# EAGLE board 2D IR PCB v37 (EAGLE 9.7.0)
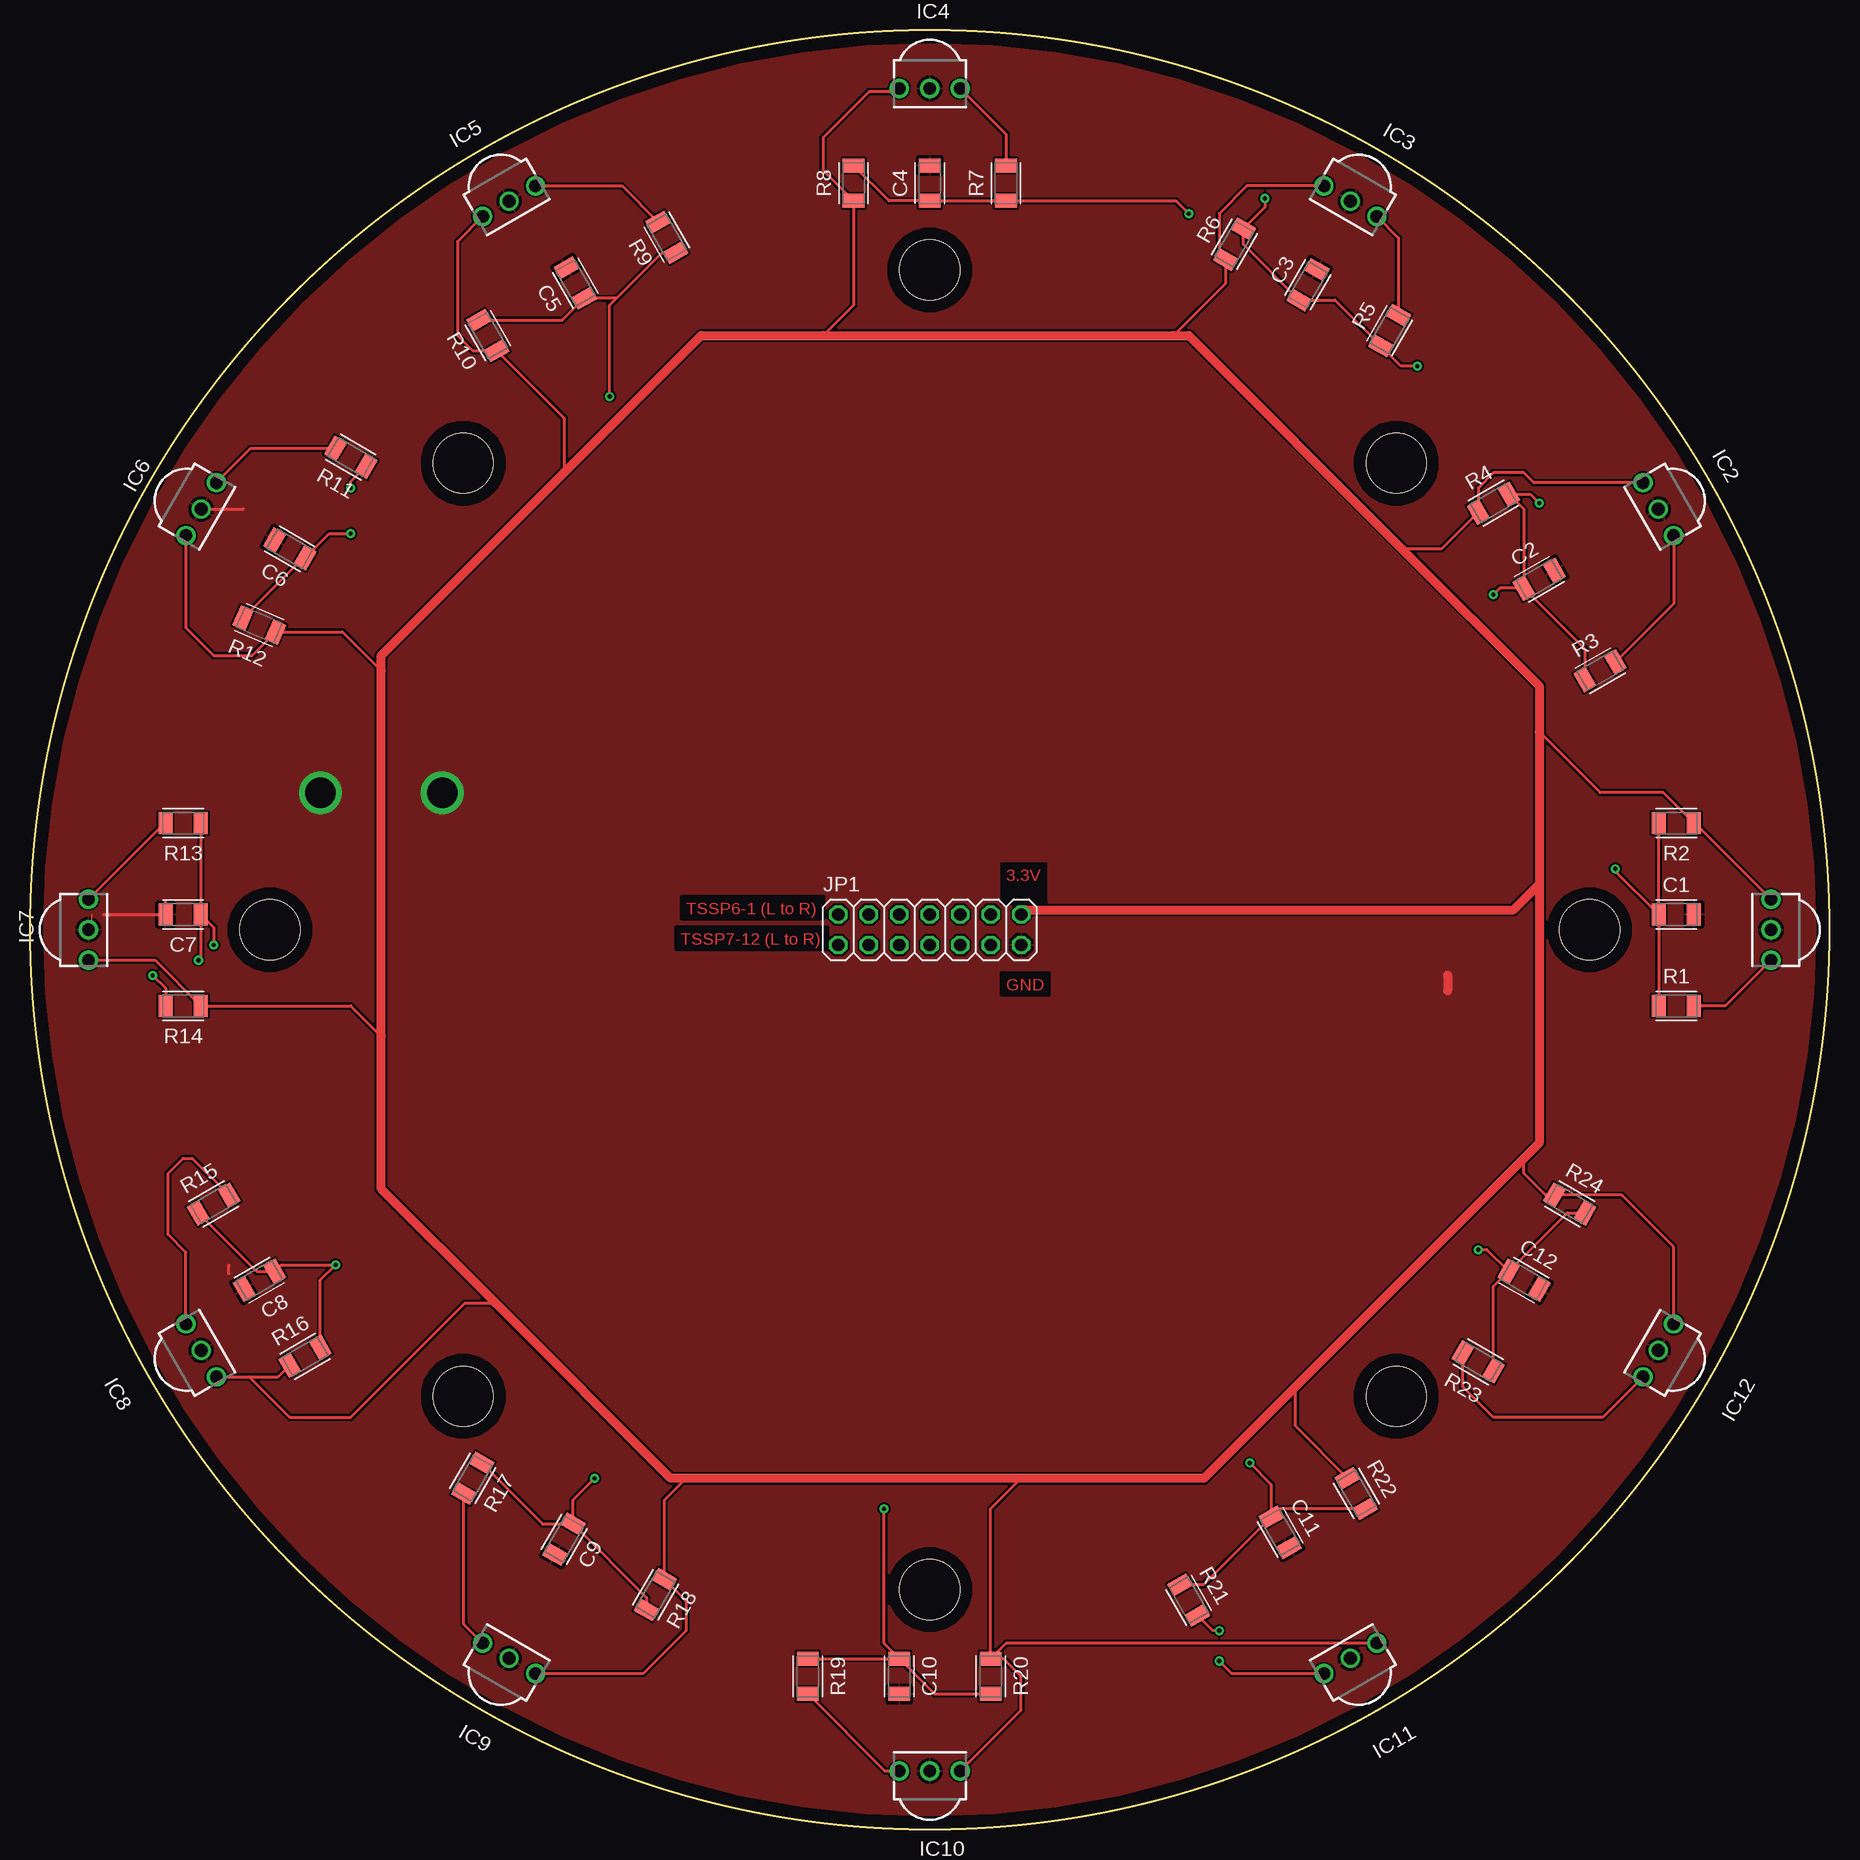
[diagram p0: board, top side]
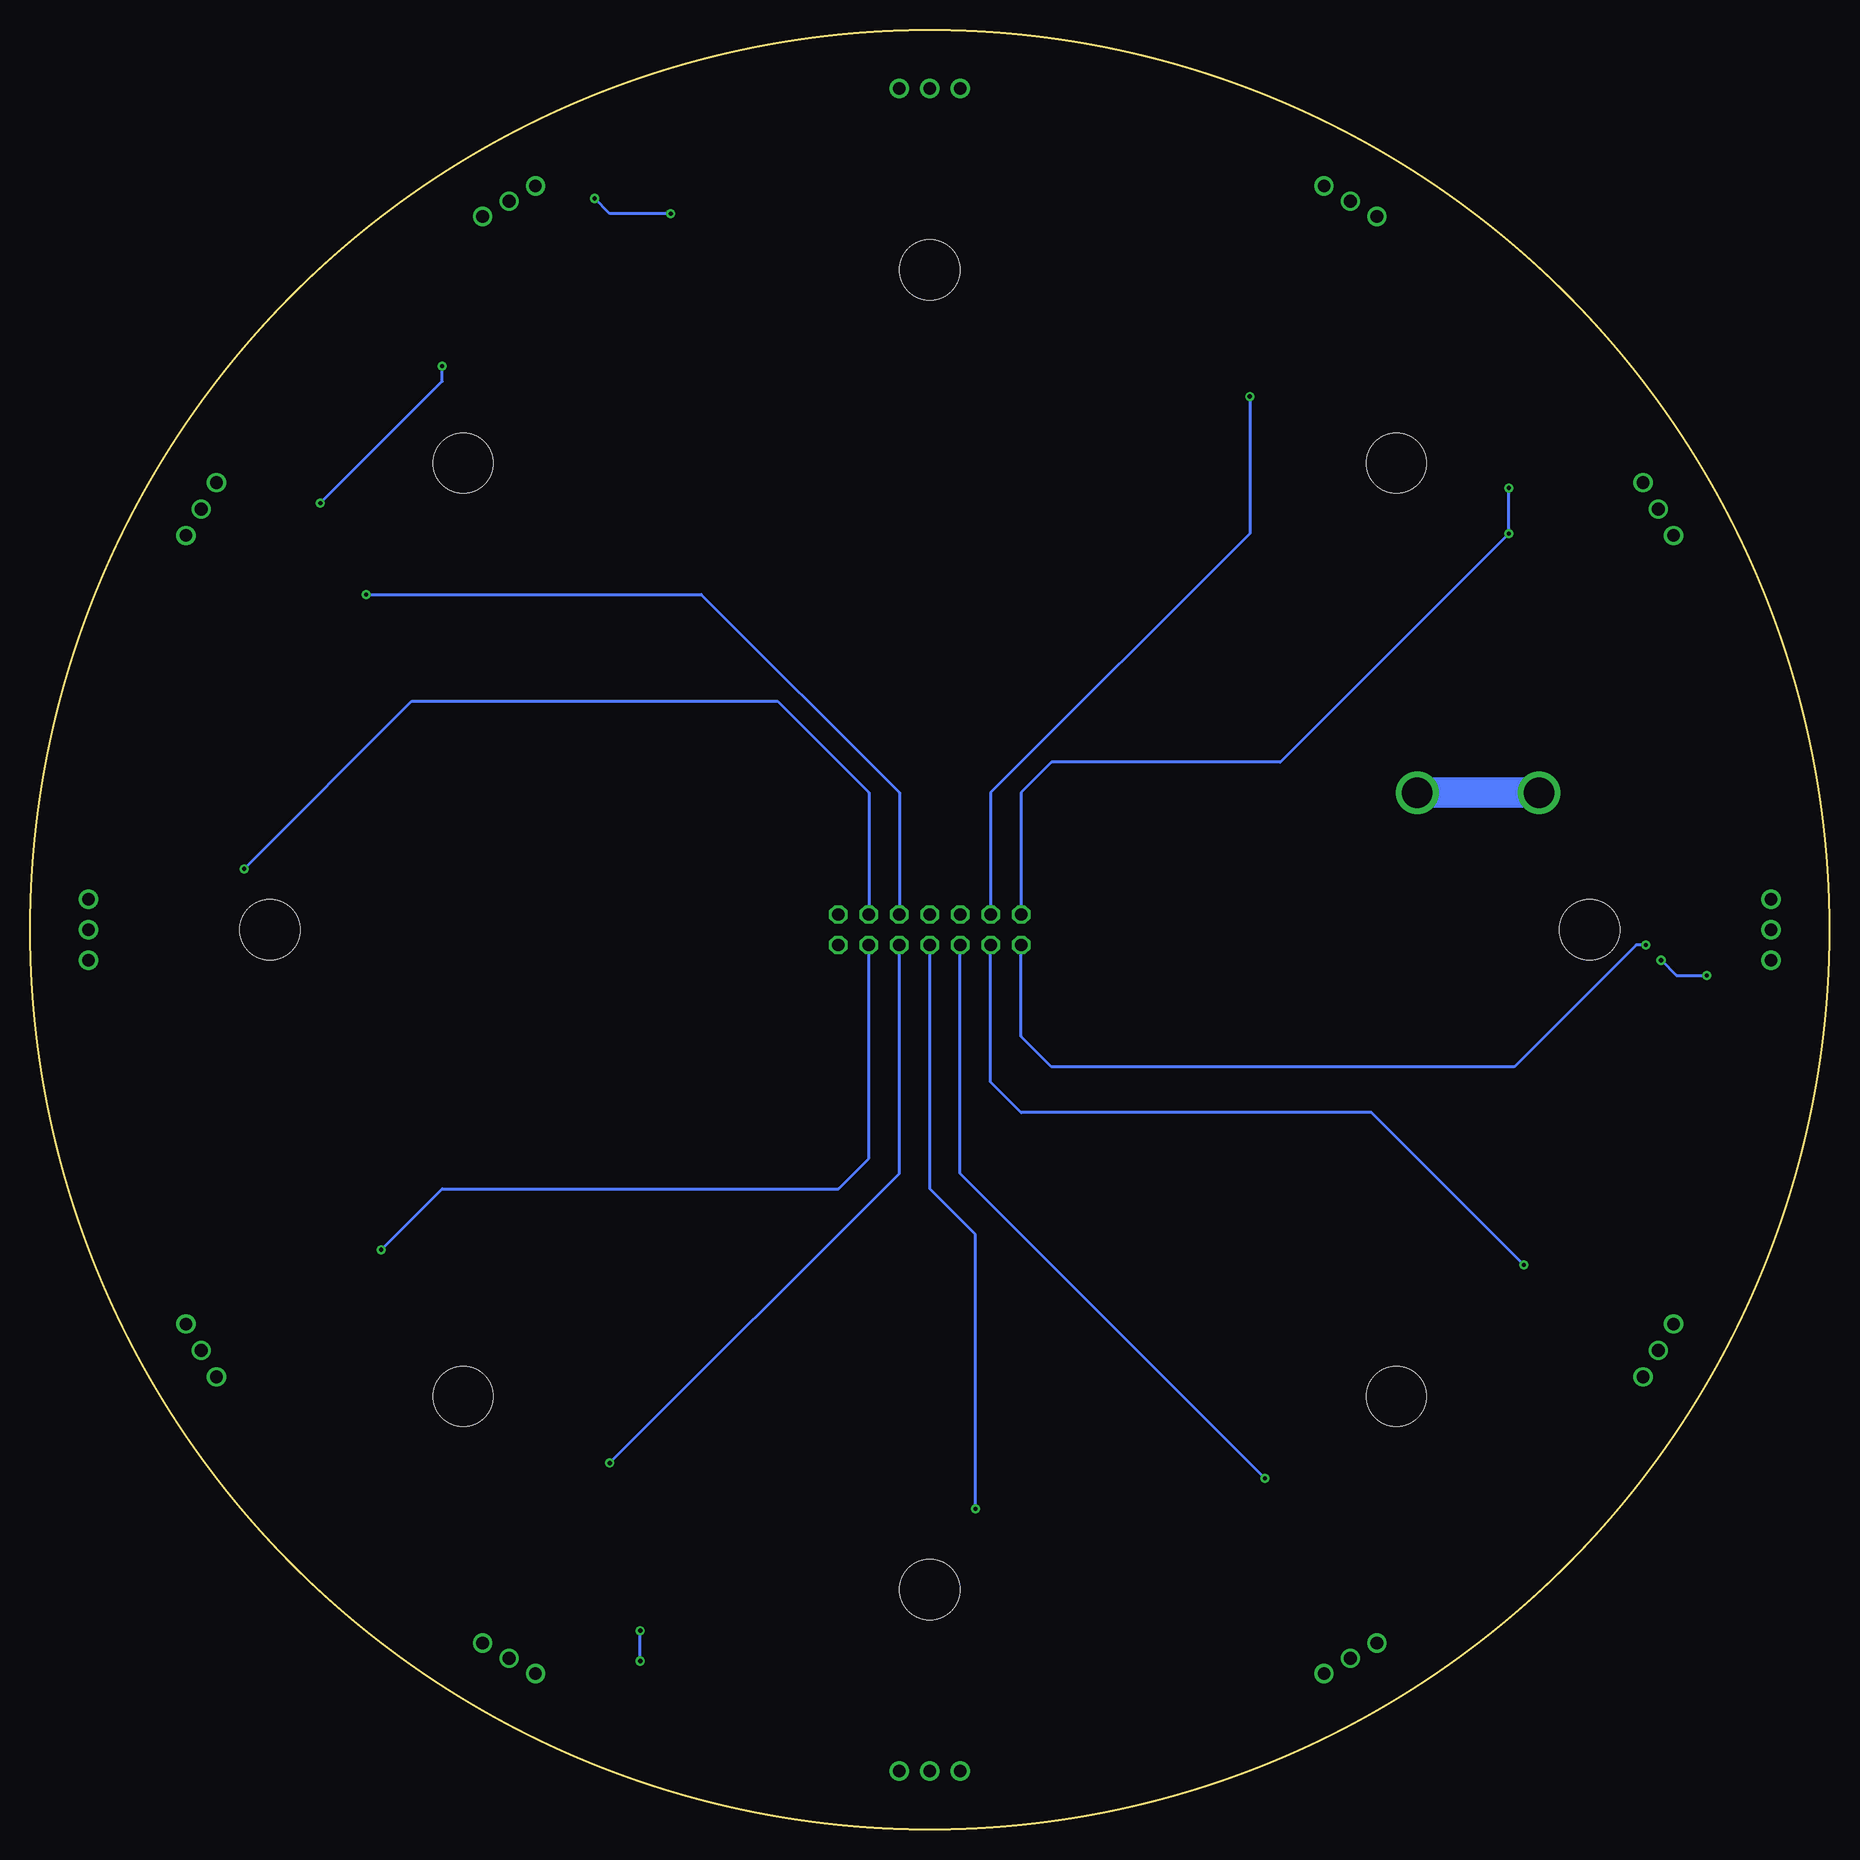
[diagram p1: board, bottom side, seen from below]

Size 150 x 150 mm. Coordinates in mm from the lower left corner, seen from the top.
Outline: circle at 75,75 radius 75
Copper layers (1*16): Top / Bottom
Stack-up Default Layer Stack: Top User Defined 0.035mm / Dielectric-1 User Defined 1.5mm / Bottom User Defined 0.035mm
Design rules: minimum copper width 6mil, minimum drill size 0.35mm, copper clearance wire_polygon to wire_polygon 6mil, copper clearance wire_polygon to pad_smd 6mil, copper clearance wire_polygon to via 6mil, copper clearance pad_smd to pad_smd 6mil, copper clearance pad_smd to via 6mil, copper clearance via to via 6mil, copper clearance smd to pad (same net) 6mil, copper clearance smd to via (same net) 6mil, copper clearance smd to smd (same net) 6mil, dimension clearance 40mil, restrict clearance 0mil, drill distance 6mil, keepout clearance 0mil
Holes 5 mm at 130,75 113.89,113.89 75,130 36.11,113.89 20,75 36.11,36.11 75,20 113.89,36.11

## Footprints (pad centres in the part's own frame; a part is rotated, then mirrored left to right if it is on the bottom)
CAPC3216X135 = smd 1.165 x 1.815: 1 -1.475,0; 2 1.475,0
TSSP4038 = drill 1.06 pad 1.6: 1 -2.54,-1.55; 2 0,-1.55; 3 2.54,-1.55
2X07 = drill 1.016 octagon: 1 -7.62,-1.27; 2 -7.62,1.27; 3 -5.08,-1.27; 4 -5.08,1.27; 5 -2.54,-1.27; 6 -2.54,1.27; 7 0,-1.27; 8 0,1.27; 9 2.54,-1.27; 10 2.54,1.27; 11 5.08,-1.27; 12 5.08,1.27; 13 7.62,-1.27; 14 7.62,1.27
RESC3216X70 = smd 1.165 x 1.815: 1 -1.475,0; 2 1.475,0

## Placement (x,y rotation side)
C1  4.7uF  [CAPC3216X135]  137.23,76.27 0 top
C2  4.7uF  [CAPC3216X135]  125.8,104.21 30 top
C3  4.7uF  [CAPC3216X135]  106.53,128.76 60 top
C4  4.7uF  [CAPC3216X135]  75,137.23 90 top
C5  4.7uF  [CAPC3216X135]  45.46,128.91 120 top
C6  4.7uF  [CAPC3216X135]  21.66,106.75 150 top
C7  4.7uF  [CAPC3216X135]  12.77,76.27 180 top
C8  4.7uF  [CAPC3216X135]  19.12,45.79 210 top
C9  4.7uF  [CAPC3216X135]  44.52,24.2 240 top
C10  4.7uF  [CAPC3216X135]  72.46,12.77 270 top
C11  4.7uF  [CAPC3216X135]  104.21,24.77 300 top
C12  4.7uF  [CAPC3216X135]  124.53,45.79 330 top
IC1  TSSP4038  [TSSP4038]  143.58,75 90 top
IC2  TSSP4038  [TSSP4038]  134.39,109.29 120 top
IC3  TSSP4038  [TSSP4038]  109.29,134.39 150 top
IC4  TSSP4038  [TSSP4038]  75,143.58 180 top
IC5  TSSP4038  [TSSP4038]  40.71,134.39 210 top
IC6  TSSP4038  [TSSP4038]  15.61,109.29 240 top
IC7  TSSP4038  [TSSP4038]  6.42,75 270 top
IC8  TSSP4038  [TSSP4038]  15.61,40.71 300 top
IC9  TSSP4038  [TSSP4038]  40.71,15.61 330 top
IC10  TSSP4038  [TSSP4038]  75,6.42 0 top
IC11  TSSP4038  [TSSP4038]  109.29,15.61 30 top
IC12  TSSP4038  [TSSP4038]  134.39,40.71 60 top
JP1  PINHD-2X7  [2X07]  75,75 0 top
R1  220  [RESC3216X70]  137.23,68.65 0 top
R2  10k  [RESC3216X70]  137.23,83.89 180 top
R3  220  [RESC3216X70]  130.88,96.59 30 top
R4  10k  [RESC3216X70]  121.99,110.56 30 top
R5  220  [RESC3216X70]  113.33,124.95 60 top
R6  10k  [RESC3216X70]  100.4,132.15 60 top
R7  220  [RESC3216X70]  81.35,137.23 90 top
R8  10k  [RESC3216X70]  68.65,137.23 90 top
R9  220  [RESC3216X70]  53.08,132.72 120 top
R10  10k  [RESC3216X70]  38.17,124.53 120 top
R11  220  [RESC3216X70]  26.74,114.39 150 top
R12  10k  [RESC3216X70]  19.12,100.4 156.6 top
R13  220  [RESC3216X70]  12.77,83.89 180 top
R14  10k  [RESC3216X70]  12.77,68.65 180 top
R15  220  [RESC3216X70]  15.31,52.14 30 top
R16  10k  [RESC3216X70]  22.93,39.44 30 top
R17  220  [RESC3216X70]  36.9,29.28 240 top
R18  10k  [RESC3216X70]  52.14,19.58 240 top
R19  220  [RESC3216X70]  64.84,12.77 270 top
R20  10k  [RESC3216X70]  80.08,12.77 270 top
R21  220  [RESC3216X70]  96.59,19.12 300 top
R22  10k  [RESC3216X70]  110.56,28.01 300 top
R23  220  [RESC3216X70]  120.72,38.98 150 top
R24  10k  [RESC3216X70]  128.34,52.14 330 top

## Library data of the parts
C1-C12 = Tutorial - Fusion 360; CATEGORY: Capacitor
IC1-IC12 = TSSP4038; ARROW_PART_NUMBER: TSSP4038; ARROW_PRICE-STOCK: https://www.arrow.com/en/products/tssp4038/vishay?region=nac; DESCRIPTION: IR Receiver Module 38KHz 25m EMI 3-Pin Vishay TSSP4038, 38kHz IR Receiver, 950nm +/-45 , 25m Range, 2.5V - 5V, Through Hole, 6 x 3.9 x 6.95mm; HEIGHT: mm; MANUFACTURER_NAME: Vishay; MANUFACTURER_PART_NUMBER: TSSP4038; MOUSER_PART_NUMBER: 782-TSSP4038; MOUSER_PRICE-STOCK: https://www.mouser.co.uk/ProductDetail/Vishay-Semiconductors/TSSP4038?qs=lgjwDzixuo3Ja5hn%252BEmOdw%3D%3D
JP1 = Connector; CATEGORY: Headers; DESCRIPTION: Header, Straight, 2x7 Position; MANUFACTURER: Generic; MPN: Generic; OPERATING_TEMPERATURE: Generic; PART_STATUS: Active; PITCH: 0.100" (2.54mm); ROHS_COMPLIANCE: Generic; SERIES: Generic; SUB-CATEGORY: Headers, Male Pins; TYPE: Board to Board or Cable, Unshrouded, Through Hole, Straight
R1-R24 = Resistor; CATEGORY: Resistor; SUB-CATEGORY: Fixed

## Nets
3V3: IC1.3 IC2.3 IC3.3 IC4.3 IC5.3 IC6.3 IC7.3 IC8.3 IC9.3 IC10.3 IC11.3 IC12.3 JP1.14 R2.1 R4.1 R6.1 R8.1 R10.1 R12.1 R14.1 R16.1 R18.1 R20.1 R22.1 R24.1
GND: C1.2 C2.2 C3.2 C4.2 C5.2 C6.2 C7.2 C8.2 C9.2 C10.2 C11.2 C12.2 IC1.2 IC2.2 IC3.2 IC4.2 IC5.2 IC6.2 IC7.2 IC8.2 IC9.2 IC10.2 IC11.2 IC12.2 JP1.13
N$1: IC12.1 R23.2
N$2: IC1.1 R1.2
N$3: IC2.1 R3.2
N$5: IC3.1 R5.2
N$7: IC4.1 R7.2
N$9: IC5.1 R9.2
N$11: IC6.1 R11.2
N$13: IC7.1 R13.2
N$15: IC8.1 R15.2
N$17: IC9.1 R17.2
N$19: IC10.1 R19.2
N$21: IC11.1 R21.2
TSSP1: C1.1 JP1.12 R1.1 R2.2
TSSP2: C2.1 C3.1 C4.1 JP1.10 R3.1 R4.2 R5.1 R6.2 R7.1 R8.2
TSSP3: JP1.8
TSSP4: JP1.6
TSSP5: C5.1 JP1.4 R9.1 R10.2
TSSP6: C6.1 JP1.2 R11.1 R12.2
TSSP7: C7.1 JP1.1 R13.1 R14.2
TSSP8: C8.1 JP1.3 R15.1 R16.2
TSSP9: C9.1 JP1.5 R17.1 R18.2
TSSP10: C10.1 JP1.7 R19.1 R20.2
TSSP11: C11.1 JP1.9 R21.1 R22.2
TSSP12: C12.1 JP1.11 R23.1 R24.2

## Tracks (layer width: path | path; a pad name or v marks a point on that pad's centre or on a via)
3V3
  Top 0.254: 114.37,106.75 117.64,106.75 R4.1 120.71,111.82 121.99,113.1 124.53,113.1 125.37,112.27 IC2.3 | R2.1 138.6,83.99 | 138.6,83.99 136.16,86.43 130.88,86.43 125.8,91.51 | 124.53,55.95 124.53,54.68 126.33,52.88 R24.1 132.68,52.88 137,48.56 IC12.3 | R20.1 80.08,26.74 82.62,29.28 | 54.68,29.28 52.88,27.48 R18.1 54.68,19.05 54.68,16.58 51.1,13 IC9.3 | 29.28,66.11 26.74,68.65 R14.1 10.44,72.46 IC7.3 | 29.28,96.59 26.06,99.81 R12.1 18.52,97.86 15.31,97.86 13,100.17 IC6.3 | 44.52,113.1 44.52,117.64 R10.1 36.91,123.25 35.63,124.53 35.63,132.36 IC5.3 | 66.11,124.53 68.65,127.07 R8.1 66.11,138.3 66.11,141.04 69.92,144.85 72.18,144.85 IC4.3 | 95.32,124.53 99.66,128.87 R6.1 99.13,131.41 99.13,134.69 101.44,137 IC3.3 | IC1.3 138.68,83.99 138.6,83.99 | IC11.3 81.37,15.54 R20.1 | 38.8,43.89 36.27,43.89 26.74,34.36 21.66,34.36 18.28,37.73 IC8.3 20.69,37.73 R16.1 | R22.1 105.48,33.63 105.48,36.9 | IC10.3 82.62,9.95 82.62,12.77 81.14,14.24 R20.1
  Top 0.762: 125.8,78.81 125.8,91.51 125.8,95.32 114.37,106.75 96.59,124.53 95.32,124.53 66.11,124.53 55.95,124.53 44.52,113.1 29.28,97.86 29.28,96.59 29.28,66.11 29.28,53.41 38.8,43.89 53.41,29.28 54.68,29.28 82.62,29.28 97.86,29.28 105.48,36.9 124.53,55.95 125.8,57.22 125.8,78.81 | JP1.14 83,76.65 123.64,76.65 125.8,78.81
GND  (via drill 2.54)
  Top 0.254: 6.14,76.27 C7.2 11.3,77.33 | IC6.2 17.8,110.06 | 16.58,46.31 16.58,47.06 | C10.2 72.25,11.5 | C3.2 107.59,130.04
  Top 0.762: 118.18,71.19 118.18,69.92
  Bottom 2.54: v34.36,86.43 v24.2,86.43
  pour Top: 6.42,167.71 180.41,168.98 186.76,-34.22 -21.52,-38.03
N$1
  Top 0.254: IC12.1 131.09,34.36 121.99,34.36 119.44,36.91 R23.2
N$2
  Top 0.254: IC1.1 141.32,68.65 R1.2
N$3
  Top 0.254: IC2.1 137,102.17 R3.2
N$5
  Top 0.254: IC3.1 114.07,132.66 R5.2
N$7
  Top 0.254: IC4.1 81.35,141.32 R7.2
N$9
  Top 0.254: IC5.1 49.34,137 R9.2
N$11
  Top 0.254: IC6.1 18.4,115.13 R11.2
N$13
  Top 0.254: IC7.1 11.22,83.89 R13.2
N$15
  Top 0.254: IC8.1 13,48.1 11.5,49.6 11.5,54.68 12.77,55.95 13.52,55.95 R15.2
N$17
  Top 0.254: IC9.1 36.16,17.11 R17.2
N$19
  Top 0.254: IC10.1 71.27,4.87 R19.2
N$21  (via drill 0.35)
  Top 0.254: IC11.1 100.17,13 v99.13,14.04 | v99.13,16.58 98.59,16.58 R21.2
  Bottom 0.254: v99.13,14.04 v99.13,16.58
TSSP1  (via drill 0.35)
  Top 0.254: C1.1 R1.1 | C1.1 R2.2 | C1.1 132.15,79.88 v132.15,80.08
  Bottom 0.254: v132.15,80.08 118.18,94.05 87.7,94.05 80.08,86.43 JP1.12
TSSP2  (via drill 0.35)
  Top 0.254: R8.2 71.6,135.75 C4.1 R7.1 95.53,135.75 v96.59,134.69 | v102.94,135.96 102.94,135.23 R6.2 101.14,132.13 C3.1 108.78,127.48 R5.1 114.28,121.99 v115.64,121.99 | C2.1 124.52,110.04 R4.2 125.06,111.3 v125.8,110.56 | C2.1 129.6,98.39 R3.1 | C2.1 122.52,103.47 v121.99,102.94
  Bottom 0.254: v96.59,134.69 101.67,134.69 v102.94,135.96 | v125.8,110.56 115.64,120.72 v115.64,121.99 | v121.99,102.94 94.05,102.94 77.54,86.43 JP1.10
TSSP5  (via drill 0.35)
  Top 0.254: R10.2 44.37,125.81 C5.1 48.89,127.63 | R9.1 52.7,131.44 48.89,127.63 | v48.33,119.45 48.33,127.07 48.89,127.63
  Bottom 0.254: JP1.4 69.92,86.43 48.33,108.02 v48.33,119.45
TSSP6  (via drill 0.35)
  Top 0.254: R12.2 22.79,106.01 C6.1 24.95,108.02 v26.74,108.02 | v26.74,111.83 26.74,112.37 R11.1
  Bottom 0.254: v26.74,111.83 v26.74,108.02 45.79,88.97 64.84,88.97 67.38,86.43 JP1.2
TSSP7  (via drill 0.35)
  Top 0.254: C7.1 14.24,72.67 v14.04,72.46 | v10.23,71.19 11.3,70.12 R14.2 | R13.1 C7.1 | C7.1 15.31,75.2 v15.31,73.73
  Bottom 0.254: v14.04,72.46 12.77,71.19 v10.23,71.19 | v15.31,73.73 16.12,73.73 26.28,63.57 64.84,63.57 67.38,66.11 JP1.1
TSSP8  (via drill 0.35)
  Top 0.254: R15.1 18.91,46.53 C8.1 20.93,47.06 v25.47,47.06 24.21,45.8 R16.2
  Bottom 0.254: v25.47,47.06 38.17,59.76 67.38,59.76 69.92,62.3 JP1.3
TSSP9  (via drill 0.35)
  Top 0.254: R17.1 42.72,25.48 C9.1 | C9.1 51.4,19.33 R18.2 | C9.1 45.26,27.48 v47.06,29.28
  Bottom 0.254: v47.06,29.28 72.46,54.68 JP1.5
TSSP10  (via drill 0.35)
  Top 0.254: C10.1 75.41,11.3 R20.2 | R19.1 C10.1 | C10.1 71.19,15.52 v71.19,26.74
  Bottom 0.254: v71.19,26.74 71.19,49.6 75,53.41 JP1.7
TSSP11  (via drill 0.35)
  Top 0.254: R22.2 104.16,26.73 C11.1 | C11.1 97.82,20.4 R21.1 | C11.1 103.47,28.75 v101.67,30.55
  Bottom 0.254: v101.67,30.55 77.54,54.68 JP1.9
TSSP12  (via drill 0.35)
  Top 0.254: R23.1 122,45.27 C12.1 | C12.1 128.13,51.4 R24.2 | C12.1 121.45,48.33 v120.72,48.33
  Bottom 0.254: v120.72,48.33 115.64,53.41 82.62,53.41 80.08,55.95 JP1.11
(copper drawn outside any net)
  shapes: Top area x1

## Text on the board
Top: 3.3V | TSSP6-1 (L to R) | TSSP7-12 (L to R) | GND